# EAGLE board Schematic2 (EAGLE 9.6.2)
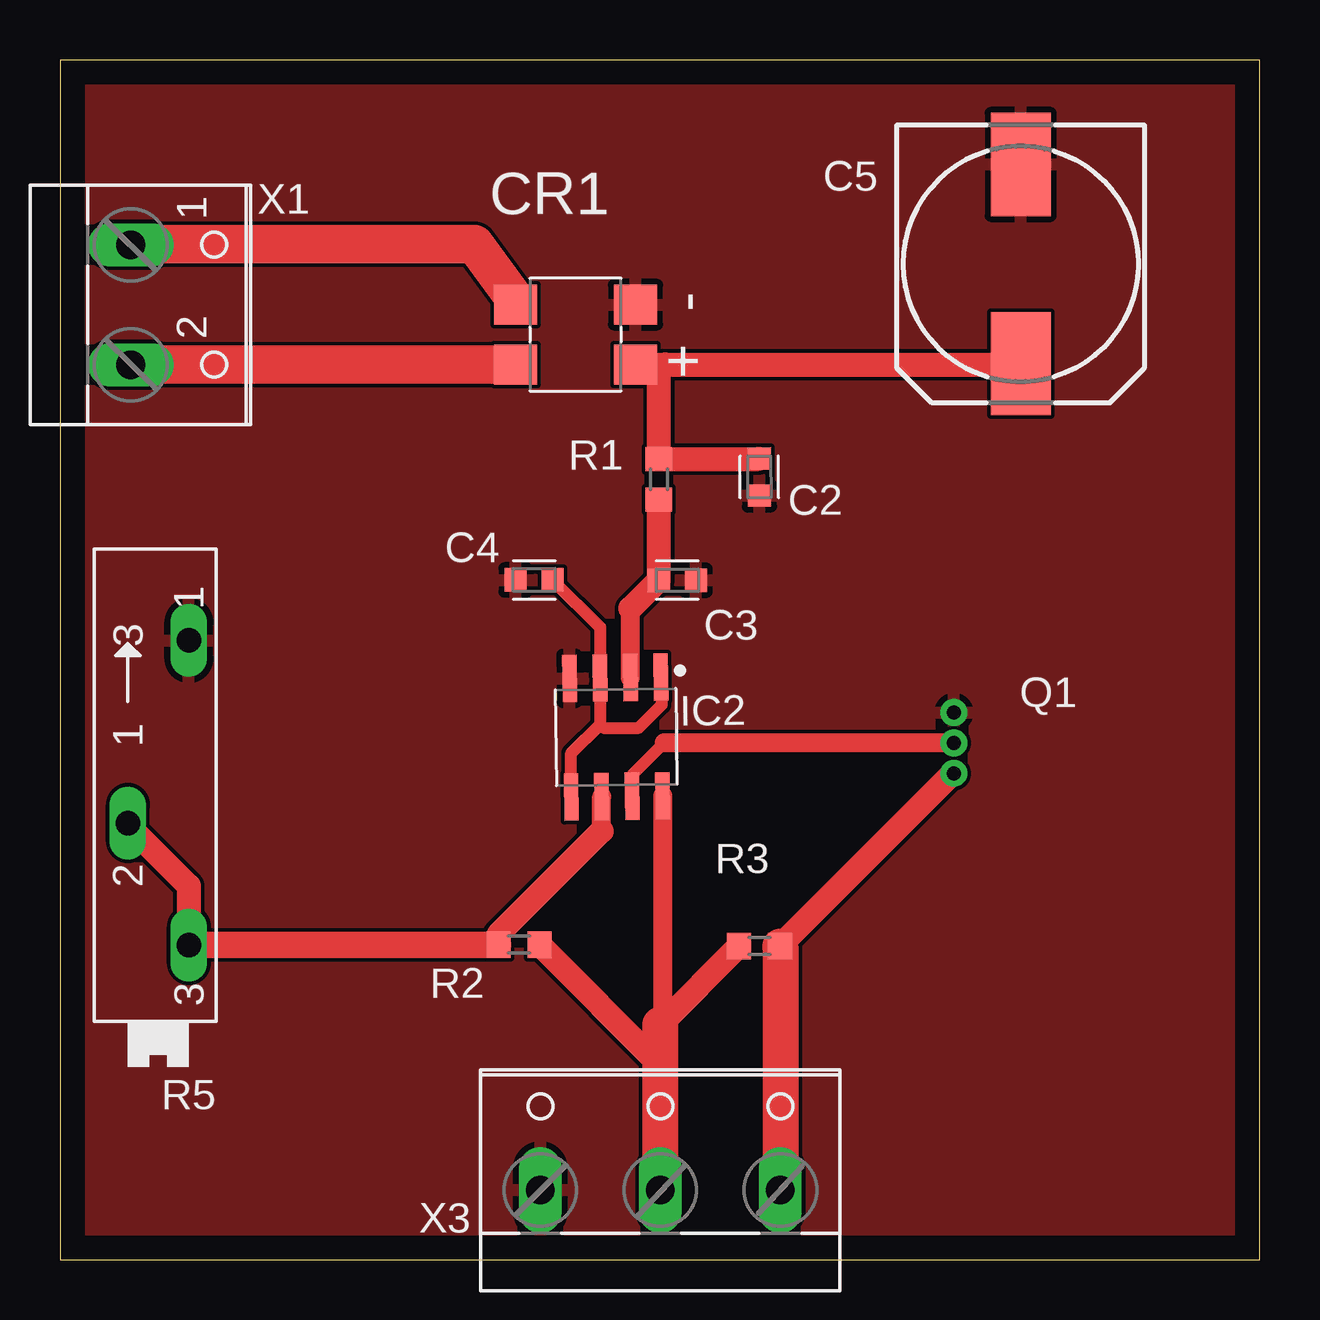
[diagram p0: board, top side]
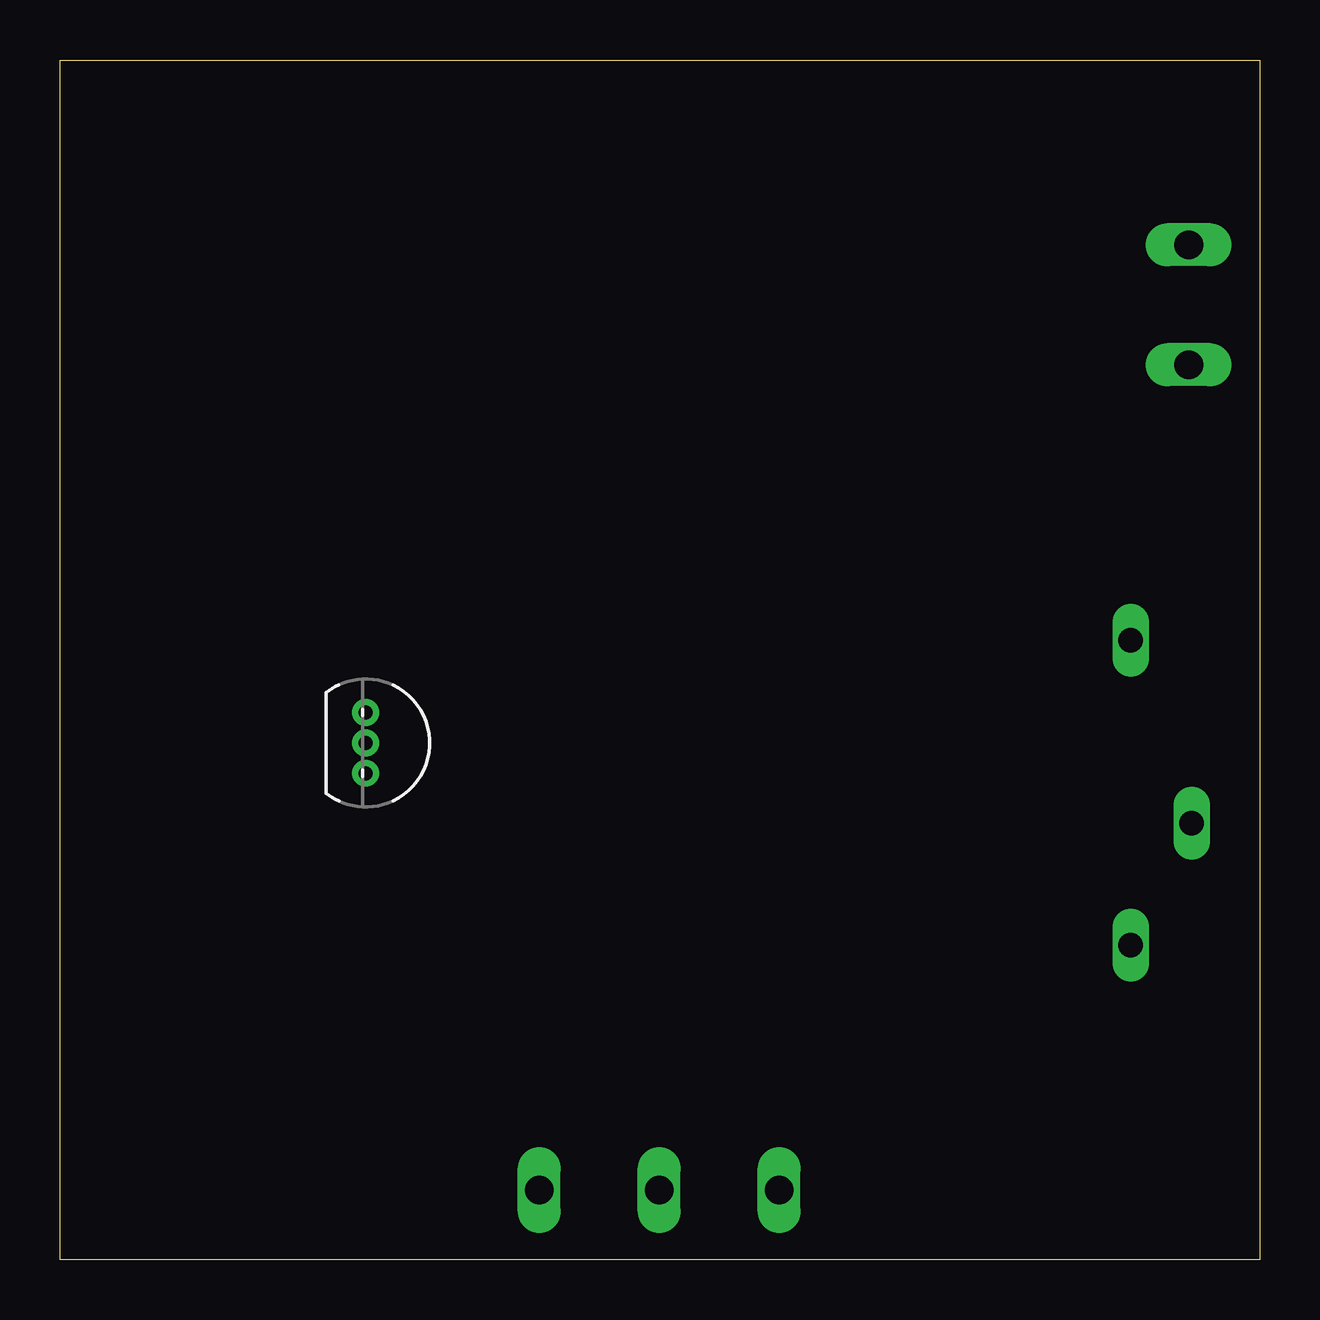
[diagram p1: board, bottom side, seen from below]

Size 50 x 50 mm. Coordinates in mm from the lower left corner, seen from the top.
Outline: 0,0 50,0 50,50 0,50 0,0
Copper layers (1*16): Top 0.035mm / dielectric 1.5mm / Bottom 0.035mm
Design rules "default": minimum track width 6mil, minimum drill 0.35mm, track to track 6mil, track to pad 6mil, pad to pad 6mil, via to via 6mil, smd to smd 6mil, copper to edge 40mil, drill to drill 6mil, minimum pad ring 10mil, minimum via ring 8mil, stop-mask expansion 4mil, vias tented up to drill 0mil, thermal gap 10mil

## Footprints (pad centres in the part's own frame; a part is rotated, then mirrored left to right if it is on the bottom)
CAPC1608X85 = smd 0.921 x 0.97: 1 -0.775,0; 2 0.775,0
140CLH-1010 = smd 4.3 x 2.5: + 4.15,0; - -4.15,0
HD01-T = smd 1.65 x 1.8: + 1.25,2.5; - -1.25,2.5; ~1 -1.25,-2.5; ~2 1.25,-2.5
SOIC127P600X175-8N = smd 1.969 x 0.592: 1 -2.474,1.905; 2 -2.474,0.635; 3 -2.474,-0.635; 4 -2.474,-1.905; 5 2.474,-1.905; 6 2.474,-0.635; 7 2.474,0.635; 8 2.474,1.905
TO92-3 = drill 0.6: 1 1.27,0; 2 0,0; 3 -1.27,0
R0603 = smd 1 x 1.1: 1 -0.85,0; 2 0.85,0
SP19L = drill 1.016 long: A 5.715,-1.27; E -6.985,-1.27; S -1.905,1.27
W237-102 = drill 1.194 long: 1 -2.5,-1.27; 2 2.5,-1.27
W237-103 = drill 1.194 long: 1 -5,-1.29; 2 0,-1.29; 3 5,-1.29

## Placement (x,y rotation side)
C2  10n  [CAPC1608X85]  29.15,32.62 270.2 top
C3  10n  [CAPC1608X85]  25.73,28.32 0 top
C4  10n  [CAPC1608X85]  19.76,28.33 180 top
C5  10u  [140CLH-1010]  40.04,41.5 270 top
CR1  HD01-T  [HD01-T]  21.49,38.55 270 top
IC2  LM358_SOIC  [SOIC127P600X175-8N]  23.18,21.78 270.8 top
Q1  BS170  [TO92-3]  37.26,21.53 270 bottom
R1  100  [R0603]  24.96,32.52 270 top
R2  10k  [R0603]  19.14,13.13 180 top
R3  1k  [R0603]  29.15,13.07 0 top
R5  10k  [SP19L]  4.1,20.09 90 top
X1  [W237-102]  4.22,39.8 270 top
X3  [W237-103]  25.02,4.19 0 top

## Library data of the parts
C2-C4 = Capacitor; CATEGORY: Capacitor
C5 = rcl; SPICEPREFIX: C
CR1 = Bridge Rectifiers; CREATED_BY: PCBLayout.com; DIGIKEY_PN: HD01DITR-ND; MANUFACTURER: Diodes Incorporated; MPN: HD01-T; PACKAGE: 4-MiniDIP
IC2 = IC_Linear; CATEGORY: Amplifier; DESCRIPTION: Dual Operational Amplifier; MANUFACTURER: Generic; MPN: Generic; SERIES: LM358; SUB-CATEGORY: OpAmp; TYPE: Dual
Q1 = Transistor; CREATED_BY: PCBLayout.com; DIGIKEY_PART_NUMBER: 2156-BS170-ND; MANUFACTURER: Fairchild Semiconductor; MPN: BS170; PACKAGE: TO92-3
R1-R3 = rcl; SPICEPREFIX: R
R5 = pot
X1 = con-wago-500; MPN: 237-102; OC_FARNELL: unknown; OC_NEWARK: 70K9898
X3 = con-wago-500; MPN: 237-103; OC_FARNELL: unknown; OC_NEWARK: 18M7116

## Nets
GND: C2.2 C3.2 C4.2 C5.- CR1.- IC2.4 Q1.3 R5.A X3.1
N$1: C2.1 C5.+ CR1.+ R1.1
N$2: C3.1 IC2.2 R1.2
N$3: IC2.6 R2.2 R5.E R5.S
N$4: C4.1 IC2.1 IC2.3 IC2.5
N$5: CR1.~1 X1.1
N$6: IC2.7 Q1.2
N$10: CR1.~2 X1.2
OUT: Q1.1 R3.2 X3.3
VCC: IC2.8 R2.1 R3.1 X3.2

## Tracks (layer width: path | path; a pad name or v marks a point on that pad's centre or on a via)
GND
  pour Top: -0.16,50.17 50.38,50.17 50.38,-0.71 -0.22,-0.71 -0.22,50.16
N$1
  Top 0.152: 24,37.38 CR1.+ | 39.99,37.38 C5.+
  Top 0.508: CR1.+ 24.95,37.3 | 40,37.3 C5.+ | 24.96,37.29 24.95,37.3 | 25.24,37.3 24.95,37.3 | 29.12,33.37 C2.1
  Top 0.8: C5.+ 40.11,37.28
  Top 1: 25.24,37.3 40,37.3 | 24.96,37.29 R1.1 29.12,33.37
N$2
  Top 0.152: R1.2
  Top 0.8: IC2.2 23.78,27.14
  Top 1: 23.78,27.14 C3.1 R1.2
N$3
  Top 0.152: R5.S 2.83,18.12 | R2.2 18.27,13.11
  Top 0.8: 22.58,17.86 IC2.6
  Top 1: 2.83,18.12 5.37,15.58 R5.E | R2.2 18.29,13.57 22.58,17.86
  Top 1.1: 18.27,13.11 R5.E
N$4
  Top 0.152: 20.54,28.17 C4.1
  Top 0.508: C4.1 22.51,26.36 IC2.3 22.51,22.31 | 22.51,22.31 22.66,22.16 24.12,22.16 25.08,23.12 25.08,24.25 IC2.1 | 22.51,22.31 21.31,21.11 IC2.5
N$5
  Top 1: X1.1 2.97,42.32
  Top 1.6: 2.97,42.32 17.29,42.32 18.99,40 CR1.~1
N$6
  Top 0.508: IC2.7 23.85,20.2 25.19,21.53
  Top 0.8: Q1.2 25.19,21.53
N$10
  Top 1.6: X1.2 CR1.~2
OUT
  Top 0.152: R3.2 30.02,13.05
  Top 0.508: 37.2,20.26 Q1.1
  Top 1: R3.2 37.2,20.26
  Top 1.5: 30.02,13.05 X3.3
VCC
  Top 0.152: 25,8.12 25.02,8.12 | 25.12,9.89 25.02,9.79
  Top 0.8: IC2.8 25.12,9.89
  Top 1: R2.1 25,8.12 | R3.1 25.02,9.79
  Top 1.5: 25.02,9.79 25.02,8.12 X3.2